# Altium PCB Control_Supply_PCB.PcbDoc (part 1 of 3)
Units mm, origin at the board's own origin, x right, y up, seen from the top; angles counter-clockwise.
Board outline 82 x 102 mm, 2 copper layers (Top Layer, Bottom Layer); 204 components, 0 nets, 808 pads, 240 vias.
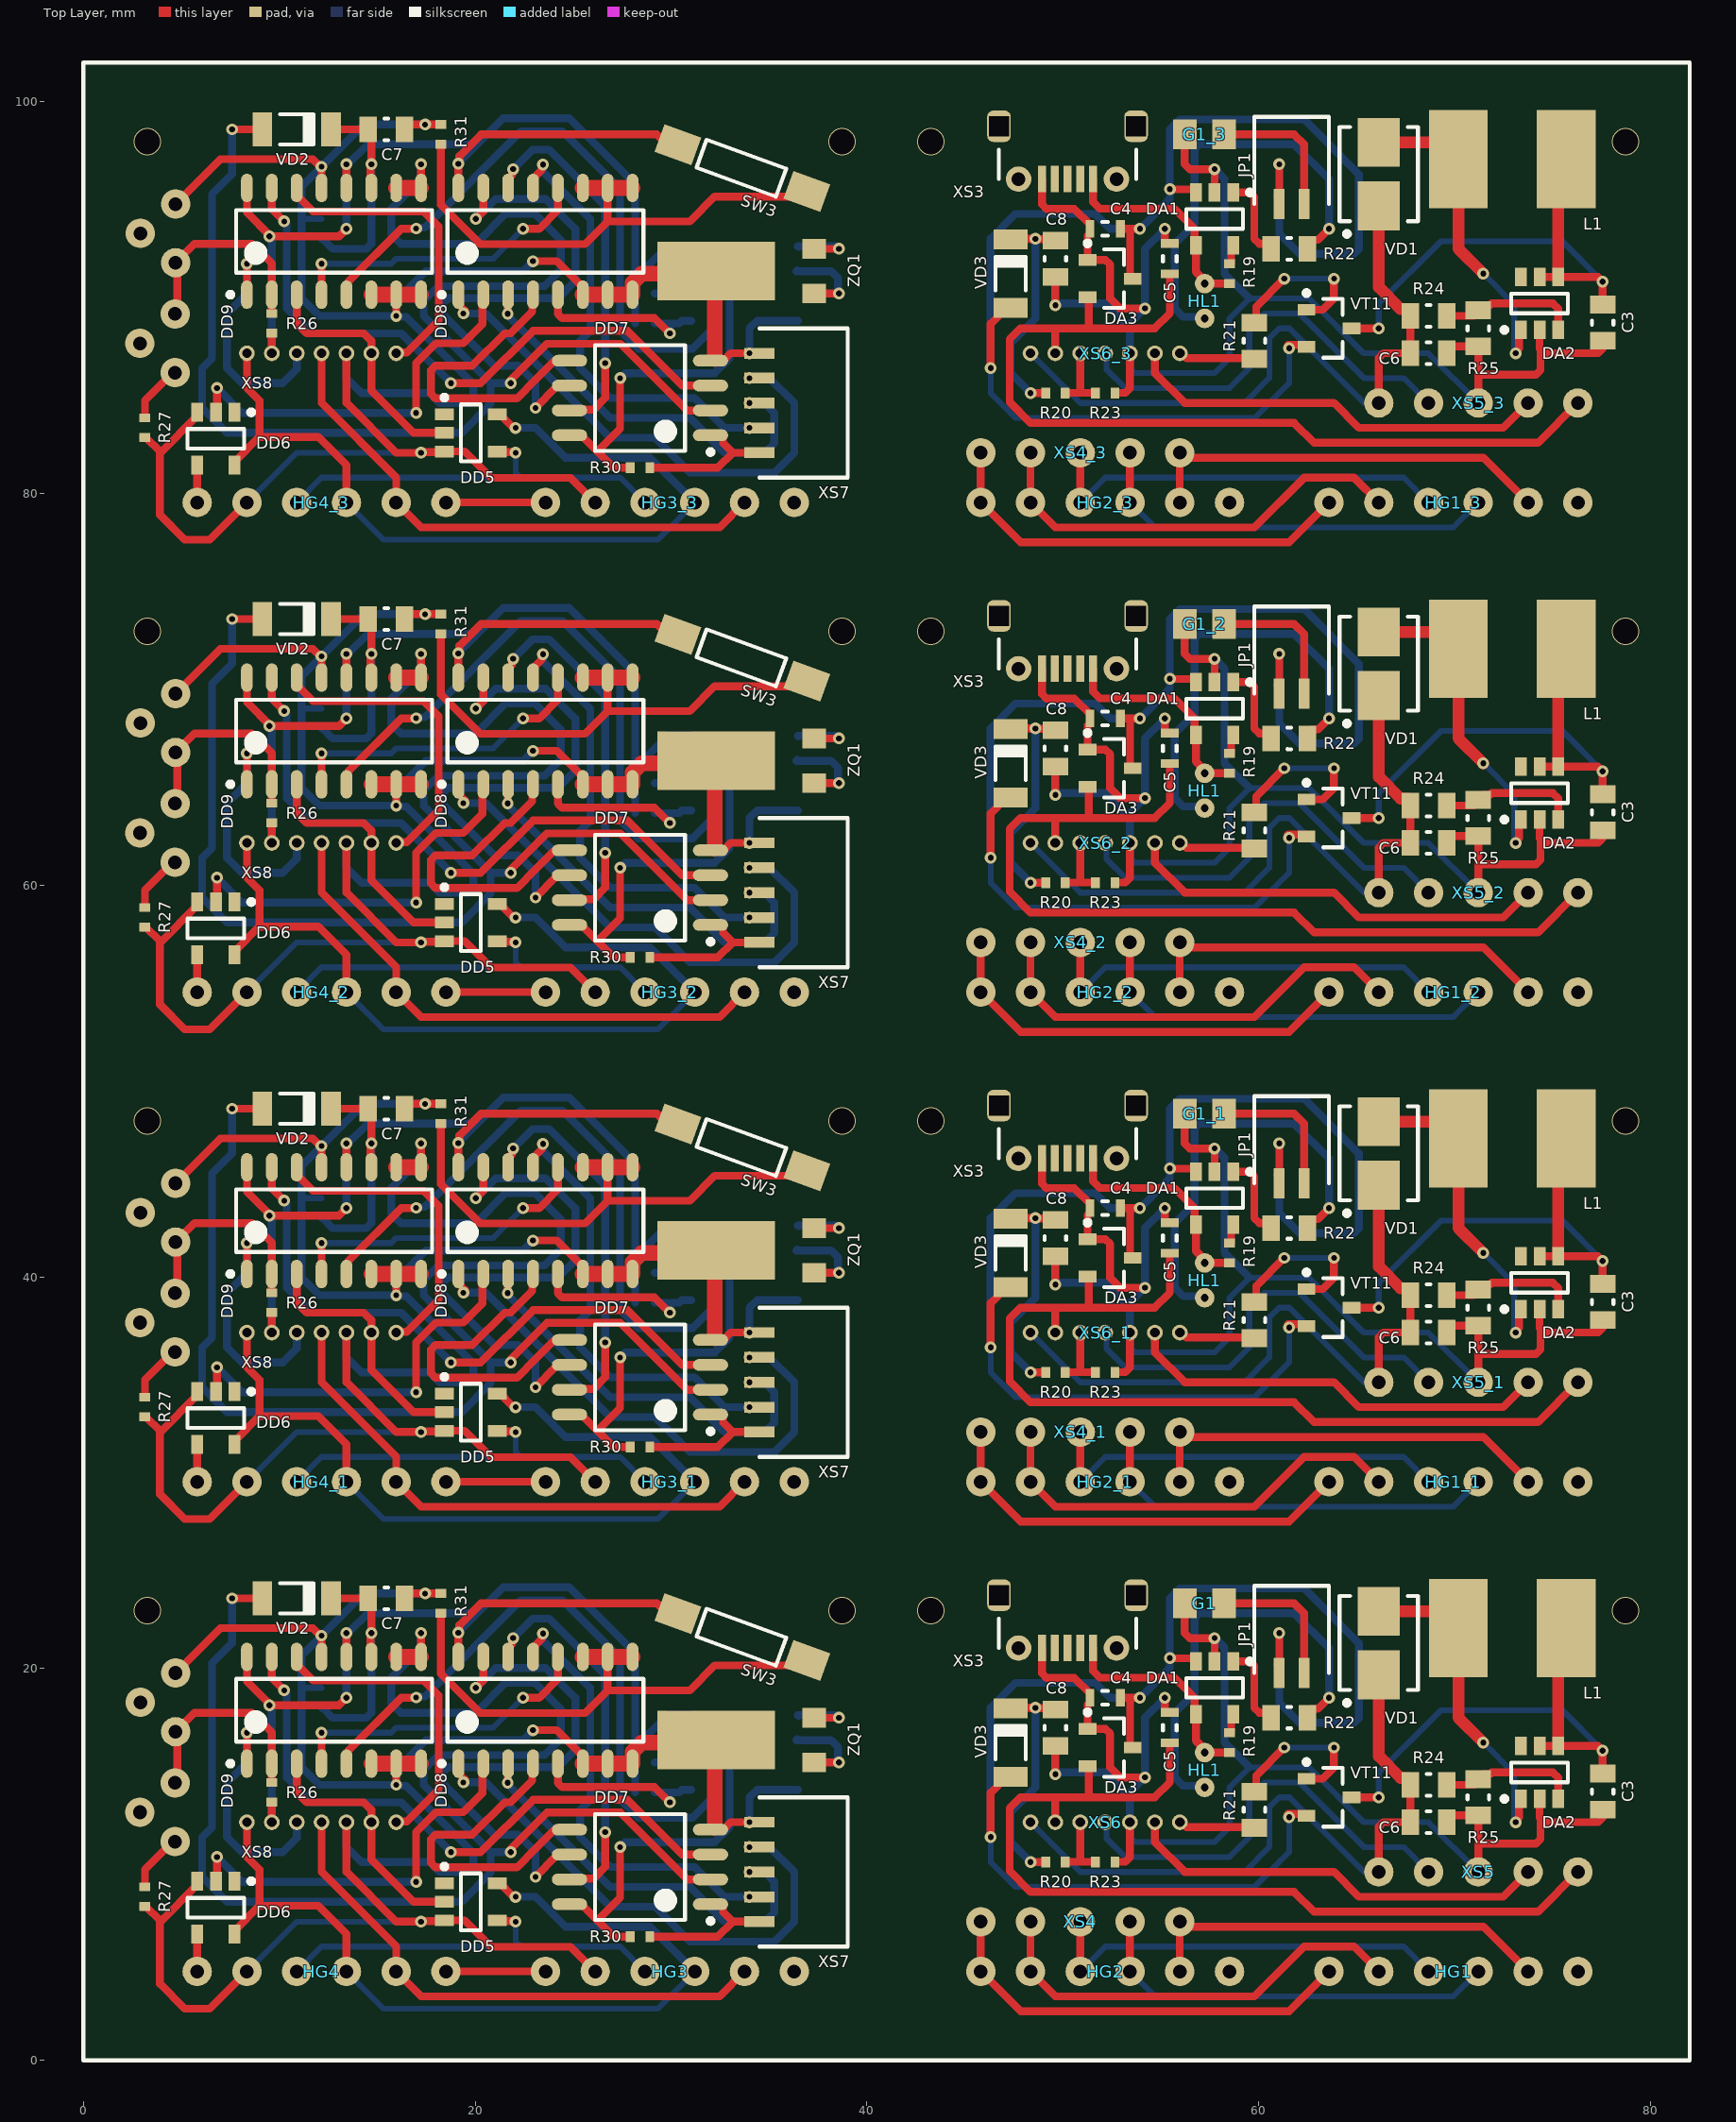
[diagram p0: Top Layer view]
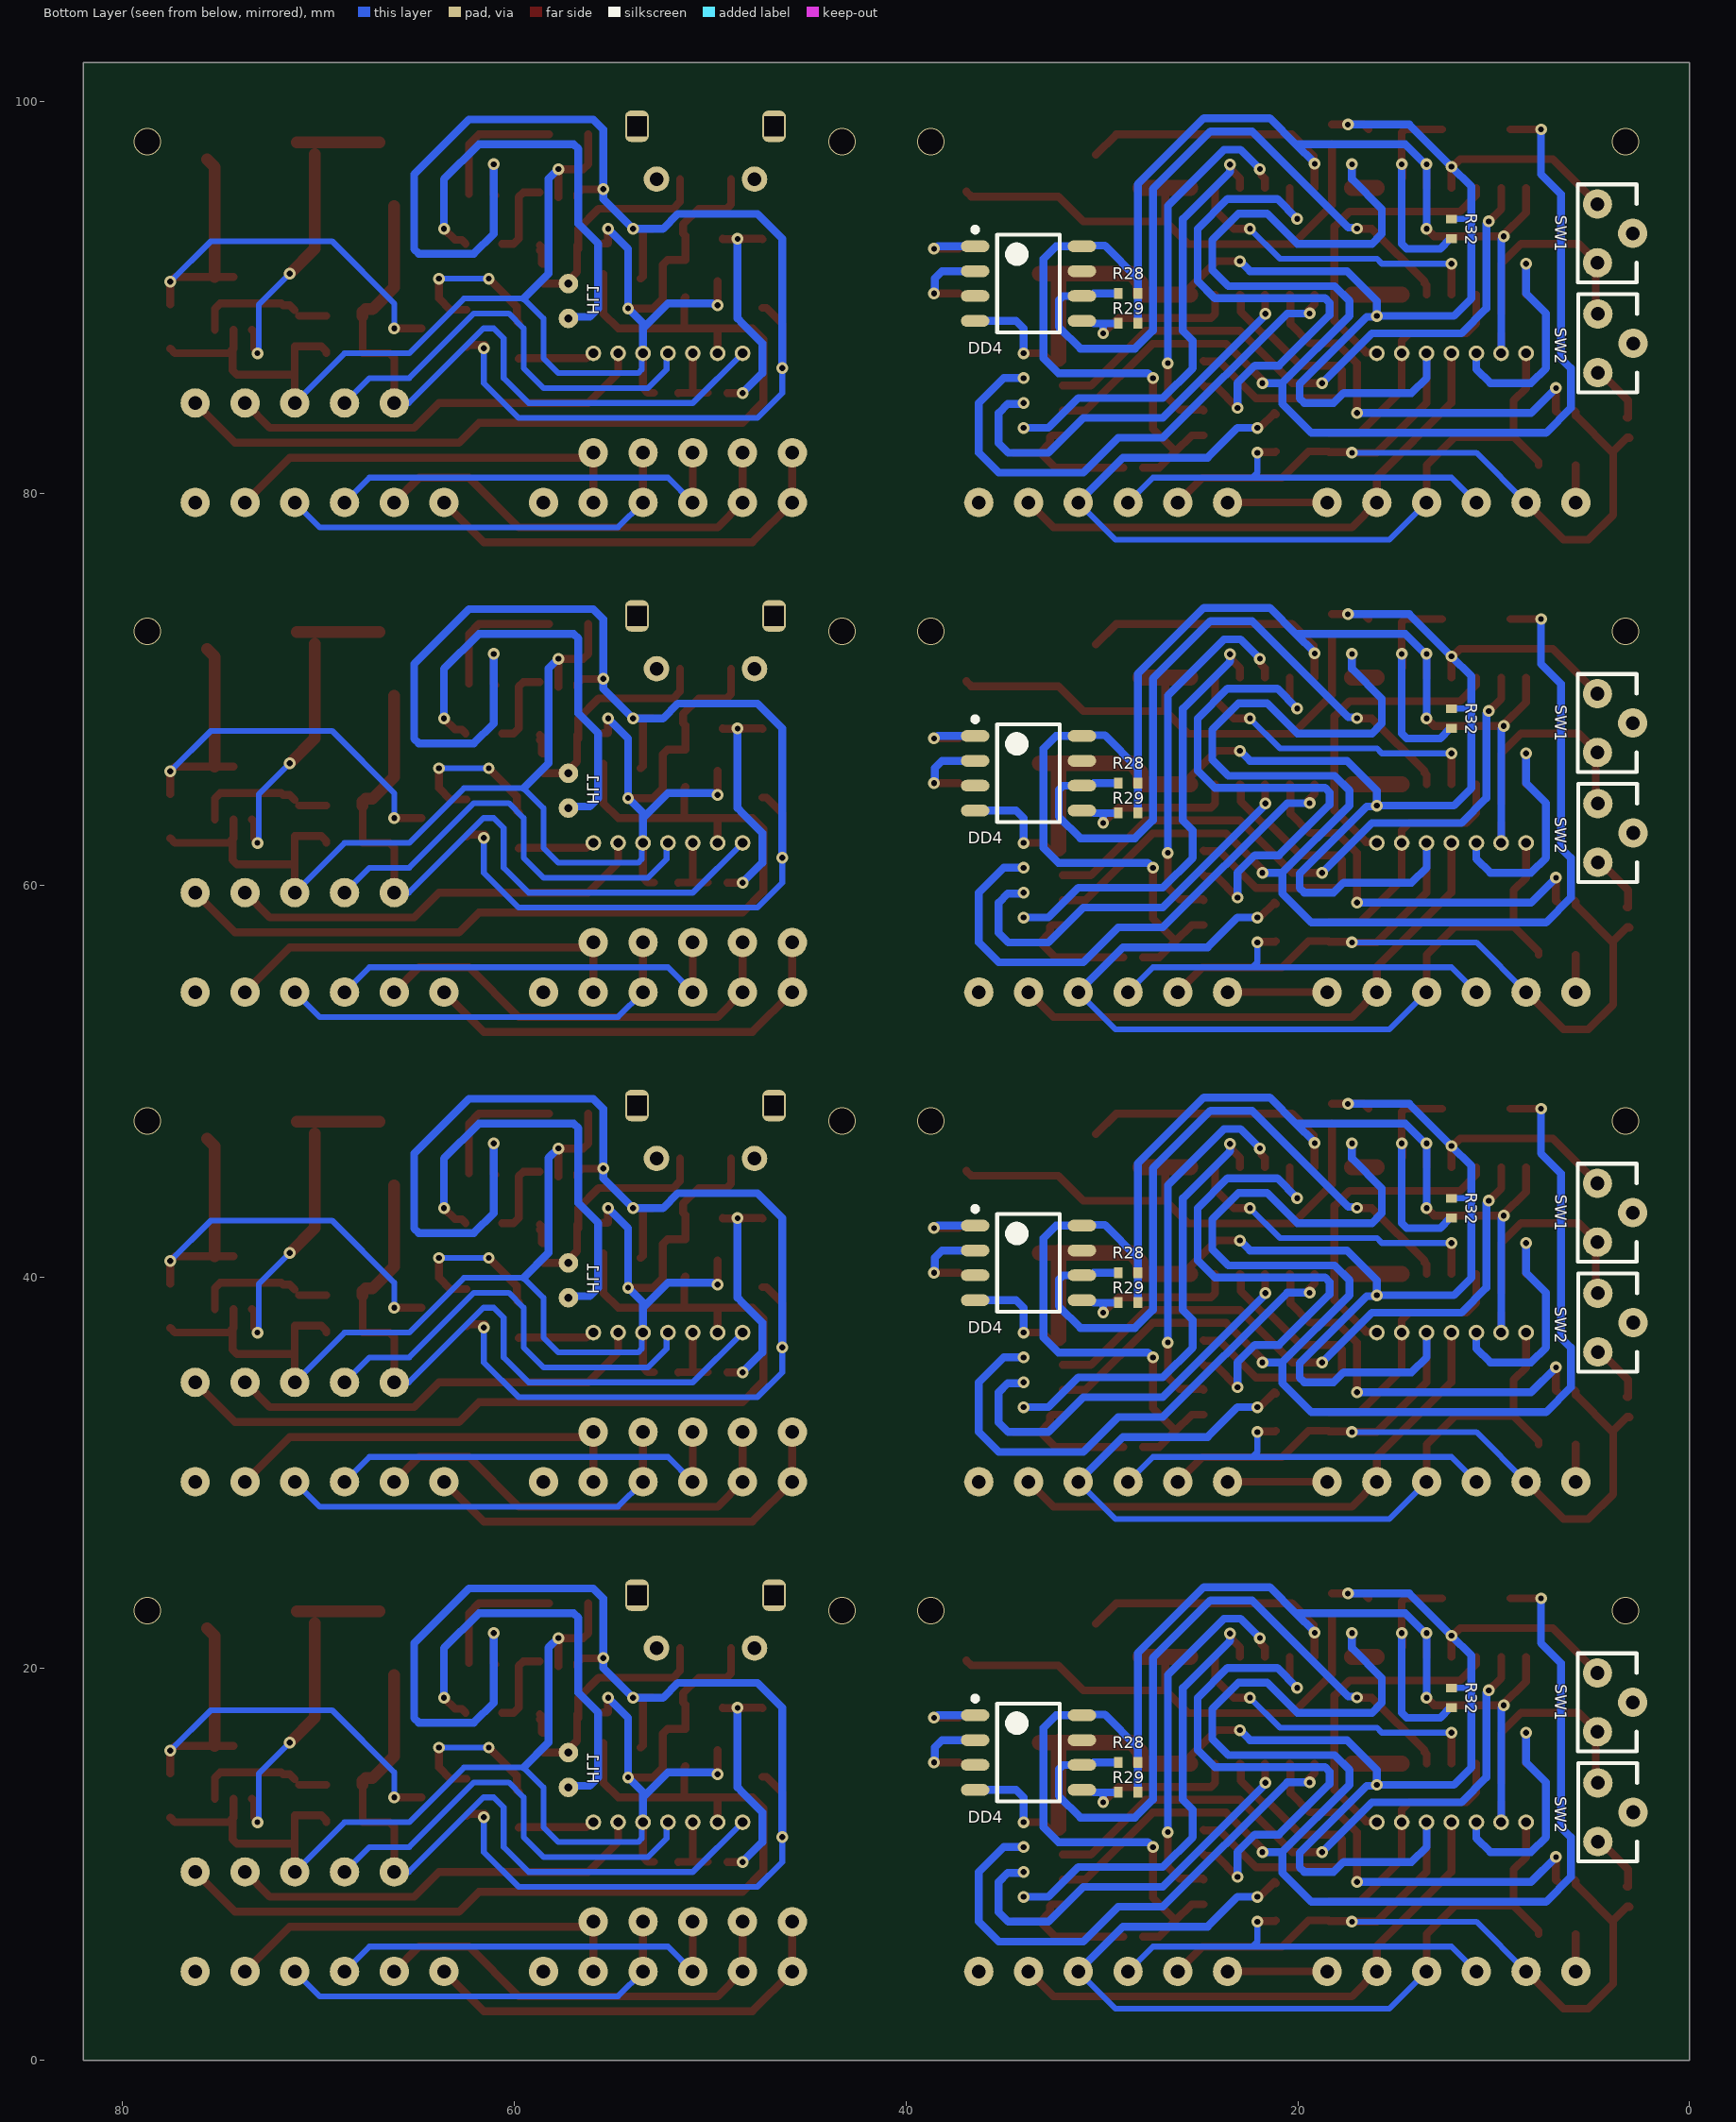
[diagram p1: Bottom Layer view, seen from below]

## Layer stack, top to bottom
Top Solder: solder mask 0.0102, Solder Resist, Dk 3.5
Top Layer: signal copper 0.0356
Dielectric 1: dielectric 0.32, FR-4, Dk 4.8
Bottom Layer: signal copper 0.0356
Bottom Solder: solder mask 0.0102, Solder Resist, Dk 3.5

## Board outline
0,0 0,102 82,102 82,0

## Design rules (kind name [scope] priority, off if disabled: settings)
Clearance [All] p1: gap=0.254 ignorepadtopadclearanceinfootprint=FALSE except(0: Arc-Hole Track-Hole SMDPad-Hole THPad-Hole Via-Hole Fill-Hole Poly-Hole Region-Hole Text-Hole; 0.05: Arc-Fill Arc-Poly Arc-Region Track-Fill Track-Poly Track-Region SMDPad-Fill SMDPad-Poly SMDPad-Region THPad-Fill THPad-Poly THPad-Region Via-Fill Via-Poly Via-Region)
PolygonConnect [All] p1: connectstyle=Relief reliefconductorwidth=0.254 reliefentries=4 polygonreliefangle="90 Angle" airgapwidth=0.254
RoutingVias [All] p1: holewidth=0.711 width=1.27 viastyle="Through Hole" minholewidth=0.711 minwidth=1.27 maxholewidth=0.711 maxwidth=1.27
SolderMaskExpansion [All] p1: expansion=0.102 istentingtop=FALSE
Width [All] p1: maxlimit=2.54 minlimit=0.254 preferedwidth=0.254 minimp=50.000000 maximp=50.000000 favimp=50.000000
30 further rules are at their usual default settings.

## Classes and differential pairs
component class Supply_core: C3 C4 C5 C6 C8 DA1 DA2 DA3 G1 HG1 HG2 HL1 JP1 L1 R19 R20 R21 R22 R23 R24 R25 VD1 VD3 VT11 XS3 XS4 XS5 XS6
component class Control_core: C7 DD4 DD5 DD6 DD7 DD8 DD9 HG3 HG4 R26 R27 R28 R29 R30 R31 R32 SW1 SW2 SW3 VD2 XS7 XS8 ZQ1

## Components (designator, comment, footprint, x,y, rotation, side; value= is the part's Value field where it differs from the comment)
C3 "C0805" CHIP-0805 77.56,38.72 r90 top
C3 "C0805" CHIP-0805 77.56,63.72 r90 top
C3 "C0805" CHIP-0805 77.56,88.72 r90 top
C3 "C0805" CHIP-0805 77.56,13.72 r90 top value=22u
C4 "C0805" CHIP-0603 52.16,43.51 r0 top
C4 "C0805" CHIP-0603 52.16,68.51 r0 top
C4 "C0805" CHIP-0603 52.16,93.51 r0 top
C4 "C0805" CHIP-0603 52.16,18.51 r0 top value=1u
C5 "C0805" CHIP-0603 55.462,41.986 r270 top
C5 "C0805" CHIP-0603 55.462,66.986 r270 top
C5 "C0805" CHIP-0603 55.462,91.986 r270 top
C5 "C0805" CHIP-0603 55.462,16.986 r270 top value=1u
C6 "C0805" CHIP-0805 68.67,37.16 r180 top
C6 "C0805" CHIP-0805 68.67,62.16 r180 top
C6 "C0805" CHIP-0805 68.67,87.16 r180 top
C6 "C0805" CHIP-0805 68.67,12.16 r180 top value=22u
C7 "C0805" CHIP-0805 15.462,48.59 r0 top
C7 "C0805" CHIP-0805 15.462,73.59 r0 top
C7 "C0805" CHIP-0805 15.462,98.59 r0 top
C7 "C0805" CHIP-0805 15.462,23.59 r0 top value=10n
C8 "C0805" CHIP-0805 49.62,41.986 r90 top
C8 "C0805" CHIP-0805 49.62,66.986 r90 top
C8 "C0805" CHIP-0805 49.62,91.986 r90 top
C8 "C0805" CHIP-0805 49.62,16.986 r90 top value=22u
DA1 "LTC4054" SOT23-5 57.748,44.018 r270 top
DA1 "LTC4054" SOT23-5 57.748,69.018 r270 top
DA1 "LTC4054" SOT23-5 57.748,94.018 r270 top
DA1 "LTC4054" SOT23-5 57.748,19.018 r270 top
DA2 "SX1308" SOT23-6 74.34,39.7 r90 top
DA2 "SX1308" SOT23-6 74.34,64.7 r90 top
DA2 "SX1308" SOT23-6 74.34,89.7 r90 top
DA2 "SX1308" SOT23-6 74.34,14.7 r90 top
DA3 "XC6206" SOT23-3 52.414,40.97 r0 top
DA3 "XC6206" SOT23-3 52.414,65.97 r0 top
DA3 "XC6206" SOT23-3 52.414,90.97 r0 top
DA3 "XC6206" SOT23-3 52.414,15.97 r0 top
DD4 "DS1337" SOIC-8 33.75,40.716 r180 bottom
DD4 "DS1337" SOIC-8 33.75,65.716 r180 bottom
DD4 "DS1337" SOIC-8 33.75,90.716 r180 bottom
DD4 "DS1337" SOIC-8 33.75,15.716 r180 bottom
DD5 "74LV1T34" SOT23-5 19.78,33.096 r0 top
DD5 "74LV1T34" SOT23-5 19.78,58.096 r0 top
DD5 "74LV1T34" SOT23-5 19.78,83.096 r0 top
DD5 "74LV1T34" SOT23-5 19.78,8.096 r0 top
DD6 "74LV1T34" SOT23-5 6.765,32.795 r270 top
DD6 "74LV1T34" SOT23-5 6.765,57.795 r270 top
DD6 "74LV1T34" SOT23-5 6.765,82.795 r270 top
DD6 "74LV1T34" SOT23-5 6.765,7.795 r270 top
DD7 "ATtiny85" SOIC-8-ATtiny85 28.416,34.874 r180 top
DD7 "ATtiny85" SOIC-8-ATtiny85 28.416,59.874 r180 top
DD7 "ATtiny85" SOIC-8-ATtiny85 28.416,84.874 r180 top
DD7 "ATtiny85" SOIC-8-ATtiny85 28.416,9.874 r180 top
DD8 "CD4053" SOIC-16 23.59,42.875 r90 top
DD8 "CD4053" SOIC-16 23.59,67.875 r90 top
DD8 "CD4053" SOIC-16 23.59,92.875 r90 top
DD8 "CD4053" SOIC-16 23.59,17.875 r90 top
DD9 "CD4053" SOIC-16 12.795,42.875 r90 top
DD9 "CD4053" SOIC-16 12.795,67.875 r90 top
DD9 "CD4053" SOIC-16 12.795,92.875 r90 top
DD9 "CD4053" SOIC-16 12.795,17.875 r90 top
G1 "Battery" BATTERY 58.224,23.336 r180 top
G1_1 "Battery" BATTERY 58.224,48.336 r180 top
G1_2 "Battery" BATTERY 58.224,73.336 r180 top
G1_3 "Battery" BATTERY 58.224,98.336 r180 top
HG1 "HDSP-2000_Colums" HDSP-2000_COL 63.59,4.54 r0 top
HG1_1 "HDSP-2000_Colums" HDSP-2000_COL 63.59,29.54 r0 top
HG1_2 "HDSP-2000_Colums" HDSP-2000_COL 63.59,54.54 r0 top
HG1_3 "HDSP-2000_Colums" HDSP-2000_COL 63.59,79.54 r0 top
HG2 "HDSP-2000_Colums" HDSP-2000_COL 45.81,4.54 r0 top
HG2_1 "HDSP-2000_Colums" HDSP-2000_COL 45.81,29.54 r0 top
HG2_2 "HDSP-2000_Colums" HDSP-2000_COL 45.81,54.54 r0 top
HG2_3 "HDSP-2000_Colums" HDSP-2000_COL 45.81,79.54 r0 top
HG3 "HDSP-2000_SPI" HDSP-2000_SPI 36.29,4.54 r180 top
HG3_1 "HDSP-2000_SPI" HDSP-2000_SPI 36.29,29.54 r180 top
HG3_2 "HDSP-2000_SPI" HDSP-2000_SPI 36.29,54.54 r180 top
HG3_3 "HDSP-2000_SPI" HDSP-2000_SPI 36.29,79.54 r180 top
HG4 "HDSP-2000_SPI" HDSP-2000_SPI 18.51,4.54 r180 top
HG4_1 "HDSP-2000_SPI" HDSP-2000_SPI 18.51,29.54 r180 top
HG4_2 "HDSP-2000_SPI" HDSP-2000_SPI 18.51,54.54 r180 top
HG4_3 "HDSP-2000_SPI" HDSP-2000_SPI 18.51,79.54 r180 top
HL1 "LED" LED_1 57.24,38.176 r90 top
HL1 "LED" LED_1 57.24,63.176 r90 top
HL1 "LED" LED_1 57.24,88.176 r90 top
HL1 "LED" LED_1 57.24,13.176 r90 top
JP1 "Jamper" JAMPER 62.32,44.78 r180 top
JP1 "Jamper" JAMPER 62.32,69.78 r180 top
JP1 "Jamper" JAMPER 62.32,94.78 r180 top
JP1 "Jamper" JAMPER 62.32,19.78 r180 top
L1 "L" L_SMD 75.694,47.066 r180 top
L1 "L" L_SMD 75.694,72.066 r180 top
L1 "L" L_SMD 75.694,97.066 r180 top
L1 "L" L_SMD 75.694,22.066 r180 top
R19 "R0805" CHIP-0402 58.51,41.224 r90 top
R19 "R0805" CHIP-0402 58.51,66.224 r90 top
R19 "R0805" CHIP-0402 58.51,91.224 r90 top
R19 "R0805" CHIP-0402 58.51,16.224 r90 top value=5,1k
R20 "R0805" CHIP-0402 49.628,35.128 r0 top
R20 "R0805" CHIP-0402 49.628,60.128 r0 top
R20 "R0805" CHIP-0402 49.628,85.128 r0 top
R20 "R0805" CHIP-0402 49.628,10.128 r0 top value=47k
R21 "R0805" CHIP-0805 59.78,37.795 r90 top
R21 "R0805" CHIP-0805 59.78,62.795 r90 top
R21 "R0805" CHIP-0805 59.78,87.795 r90 top
R21 "R0805" CHIP-0805 59.78,12.795 r90 top value=220R
R22 "R0805" CHIP-0805 61.558,42.494 r180 top
R22 "R0805" CHIP-0805 61.558,67.494 r180 top
R22 "R0805" CHIP-0805 61.558,92.494 r180 top
R22 "R0805" CHIP-0805 61.558,17.494 r180 top value=470R
R23 "R0805" CHIP-0402 52.16,35.128 r0 top
R23 "R0805" CHIP-0402 52.16,60.128 r0 top
R23 "R0805" CHIP-0402 52.16,85.128 r0 top
R23 "R0805" CHIP-0402 52.16,10.128 r0 top value=47k
R24 "R0805" CHIP-0805 68.67,39.065 r180 top
R24 "R0805" CHIP-0805 68.67,64.065 r180 top
R24 "R0805" CHIP-0805 68.67,89.065 r180 top
R24 "R0805" CHIP-0805 68.67,14.065 r180 top value=15k
R25 "R0805" CHIP-0805 71.21,38.43 r90 top
R25 "R0805" CHIP-0805 71.21,63.43 r90 top
R25 "R0805" CHIP-0805 71.21,88.43 r90 top
R25 "R0805" CHIP-0805 71.21,13.43 r90 top value=2k
R26 "R0402" CHIP-0402 9.62,38.684 r270 top
R26 "R0402" CHIP-0402 9.62,63.684 r270 top
R26 "R0402" CHIP-0402 9.62,88.684 r270 top
R26 "R0402" CHIP-0402 9.62,13.684 r270 top value=10k
R27 "R0402" CHIP-0402 3.143,33.358 r270 top
R27 "R0402" CHIP-0402 3.143,58.358 r270 top
R27 "R0402" CHIP-0402 3.143,83.358 r270 top
R27 "R0402" CHIP-0402 3.143,8.358 r270 top value=51k
R28 "R0402" CHIP-0402 28.67,40.208 r180 bottom
R28 "R0402" CHIP-0402 28.67,65.208 r180 bottom
R28 "R0402" CHIP-0402 28.67,90.208 r180 bottom
R28 "R0402" CHIP-0402 28.67,15.208 r180 bottom value=4,7k
R29 "R0402" CHIP-0402 28.67,38.684 r180 bottom
R29 "R0402" CHIP-0402 28.67,63.684 r180 bottom
R29 "R0402" CHIP-0402 28.67,88.684 r180 bottom
R29 "R0402" CHIP-0402 28.67,13.684 r180 bottom value=4,7k
R30 "R0402" CHIP-0402 28.416,31.318 r180 top
R30 "R0402" CHIP-0402 28.416,56.318 r180 top
R30 "R0402" CHIP-0402 28.416,81.318 r180 top
R30 "R0402" CHIP-0402 28.416,6.318 r180 top value=20k
R31 "R0402" CHIP-0402 18.256,48.336 r90 top
R31 "R0402" CHIP-0402 18.256,73.336 r90 top
R31 "R0402" CHIP-0402 18.256,98.336 r90 top
R31 "R0402" CHIP-0402 18.256,23.336 r90 top value=20k
R32 "R0402" CHIP-0402 12.16,43.51 r90 bottom
R32 "R0402" CHIP-0402 12.16,68.51 r90 bottom
R32 "R0402" CHIP-0402 12.16,93.51 r90 bottom
R32 "R0402" CHIP-0402 12.16,18.51 r90 bottom value=10k
SW1 "Button" BUTTON 4.707,44.78 r270 bottom
SW1 "Button" BUTTON 4.707,69.78 r270 bottom
SW1 "Button" BUTTON 4.707,94.78 r270 bottom
SW1 "Button" BUTTON 4.707,19.78 r270 bottom
SW2 "Button" BUTTON 4.685,39.168 r270 bottom
SW2 "Button" BUTTON 4.685,64.168 r270 bottom
SW2 "Button" BUTTON 4.685,89.168 r270 bottom
SW2 "Button" BUTTON 4.685,14.168 r270 bottom
SW3 "Switch" SWITCH 36.925,45.415 r160 top
SW3 "Switch" SWITCH 36.925,70.415 r160 top
SW3 "Switch" SWITCH 36.925,95.415 r160 top
SW3 "Switch" SWITCH 36.925,20.415 r160 top
VD1 "SS34" DIOD 66.13,46.304 r90 top
VD1 "SS34" DIOD 66.13,71.304 r90 top
VD1 "SS34" DIOD 66.13,96.304 r90 top
VD1 "SS34" DIOD 66.13,21.304 r90 top
VD2 "BAS85" DIOD_MELF 10.89,48.59 r180 top
VD2 "BAS85" DIOD_MELF 10.89,73.59 r180 top
VD2 "BAS85" DIOD_MELF 10.89,98.59 r180 top
VD2 "BAS85" DIOD_MELF 10.89,23.59 r180 top
VD3 "BAS85" DIOD_MELF 47.334,41.224 r270 top
VD3 "BAS85" DIOD_MELF 47.334,66.224 r270 top
VD3 "BAS85" DIOD_MELF 47.334,91.224 r270 top
VD3 "BAS85" DIOD_MELF 47.334,16.224 r270 top
VT11 "AO3401A" SOT23-3 63.59,38.43 r0 top
VT11 "AO3401A" SOT23-3 63.59,63.43 r0 top
VT11 "AO3401A" SOT23-3 63.59,88.43 r0 top
VT11 "AO3401A" SOT23-3 63.59,13.43 r0 top
XS3 "Micro_USB" Micro_USB 50.24,46.05 r180 top
XS3 "Micro_USB" Micro_USB 50.24,71.05 r180 top
XS3 "Micro_USB" Micro_USB 50.24,96.05 r180 top
XS3 "Micro_USB" Micro_USB 50.24,21.05 r180 top
XS4 "Socket" SOCKET 45.81,7.08 r0 top
XS4_1 "Socket" SOCKET 45.81,32.08 r0 top
XS4_2 "Socket" SOCKET 45.81,57.08 r0 top
XS4_3 "Socket" SOCKET 45.81,82.08 r0 top
XS5 "Socket" SOCKET 66.13,9.62 r0 top
XS5_1 "Socket" SOCKET 66.13,34.62 r0 top
XS5_2 "Socket" SOCKET 66.13,59.62 r0 top
XS5_3 "Socket" SOCKET 66.13,84.62 r0 top
XS6 "Socket_7" SOCKET_7 48.35,12.16 r0 top
XS6_1 "Socket_7" SOCKET_7 48.35,37.16 r0 top
XS6_2 "Socket_7" SOCKET_7 48.35,62.16 r0 top
XS6_3 "Socket_7" SOCKET_7 48.35,87.16 r0 top
XS7 "Prog_connector" Prog_connector 34.512,32.08 r90 top
XS7 "Prog_connector" Prog_connector 34.512,57.08 r90 top
XS7 "Prog_connector" Prog_connector 34.512,82.08 r90 top
XS7 "Prog_connector" Prog_connector 34.512,7.08 r90 top
XS8 "Socket_7" SOCKET_7 8.35,37.16 r0 top
XS8 "Socket_7" SOCKET_7 8.35,62.16 r0 top
XS8 "Socket_7" SOCKET_7 8.35,87.16 r0 top
XS8 "Socket_7" SOCKET_7 8.35,12.16 r0 top
ZQ1 "HZ" HZ 37.306,41.351 r90 top
ZQ1 "HZ" HZ 37.306,66.351 r90 top
ZQ1 "HZ" HZ 37.306,91.351 r90 top
ZQ1 "HZ" HZ 37.306,16.351 r90 top

## Footprints (in the part's own frame and the unit in brackets; to place one, negate y for a bottom-side part, rotate by r counter-clockwise, add the part's x,y. Pads: shape width x height; smd on the part's side, far side on the other; paste and mask are expansions set on the pad)
BATTERY [mm]
  rect 1.2x1.524 smd: 1(0,0) 2(2,0)
BUTTON [mm]
  round 1.5 hole 0.7: 1(0,0) 2(3,0) 3(1.5,1.8)
  silkscreen extent -1,-1 4,2
CHIP-0402 [mm] "Chip Resistor, 2-Leads, Body 1,00x0,50mm, IPC Medium Density"
  rect 0.45x0.55 smd: 1(-0.5,0) 2(0.5,0)
  body extent -0.5,-0.25 0.5,0.25, height 0.35
CHIP-0603 [mm] "Chip Capacitor, 2-Leads, Body 1,55x0,85mm, IPC Medium Density"
  rect 0.45x0.9 smd: 1(-0.775,0) 2(0.775,0)
  silkscreen extent -0.15,-0.35 0.15,0.35, body extent -0.77,-0.43 0.77,0.42, height 0.35
CHIP-0805 [mm] "Chip Resistor, 2-Leads, Body 2,00x1,25mm, IPC Medium Density"
  rect 0.9x1.3 smd: 1(-0.925,0) 2(0.925,0)
  silkscreen extent -0.1,-0.55 0.1,0.55, body extent -1,-0.63 1,0.63, height 0.7
DIOD [mm] "Molded Diode, 2-Leads, Body 4,40x3,63mm, IPC Medium Density"
  rect 2.5x2.15 smd: 1(-1.625,0) 2(1.625,0)
  silkscreen extent -3.17,-2 2.4,2, body extent -2.38,-1.97 2.37,1.97, height 2.6
DIOD_MELF [mm] "MELF Diode, 2-Leads, Body 3,50x1,53mm, IPC Medium Density"
  rect 1x1.75 smd: 1(-1.75,0) 2(1.75,0)
  silkscreen extent -0.85,-0.77 0.85,0.77, body extent -1.85,-0.8 1.85,0.8, height 1.59
HDSP-2000_COL [mm]
  round 1.5 hole 0.7: 1(0,0) 2(2.54,0) 3(5.08,0) 4(7.62,0) 5(10.16,0) 6(12.7,0)
HDSP-2000_SPI [mm]
  round 1.5 hole 0.7: 7(0,0) 8(2.54,0) 9(5.08,0) 10(7.62,0) 11(10.16,0) 12(12.7,0)
HZ [mm]
  rect 1x1.2 smd: 1(-1.143,0) 2(1.143,0)
  rect 3x6 smd: 3(0,5)
JAMPER [mm]
  rect 0.55x1.524 smd: 1(0,0) 2(1.27,0)
  silkscreen extent -1.27,-4.44 2.54,0
L_SMD [mm]
  rect 3x5 smd: 1(0,0) 2(5.5,0)
LED_1 [mm]
  round 1 hole 0.4: 1(0.762,0) 2(2.54,0)
Micro_USB [mm]
  rect 0.4x1.35 smd: 1(-1.3,0) 2(-0.65,0) 3(0,0) 4(0.65,0) 5(1.3,0)
  round 1.3 hole 0.7: 6(-2.5,0) 7(2.5,0)
  rrect50% 1.2x1.6 hole 1 square: 8(-3.5,-2.7) 9(3.5,-2.7)
  silkscreen extent -3.5,-1.5 3.5,0
Prog_connector [mm]
  rect 0.55x1.524 smd: 1(0,0) 2(1.27,0) 3(2.54,0) 4(3.81,0) 5(5.08,0)
  silkscreen extent -1.27,-4.5 6.35,0
SOCKET [mm]
  round 1.5 hole 0.7: 1(0,0) 2(2.54,0) 3(5.08,0) 4(7.62,0) 5(10.16,0)
SOCKET_7 [mm]
  round 0.8 hole 0.5: 1(0,0) 2(1.27,0) 3(2.54,0) 4(3.81,0) 5(5.08,0) 6(6.35,0) 7(7.62,0)
SOIC-8 [mm] "SOIC, 8-Leads, Body 4,88x3,90mm, Pitch 1,27mm, IPC Medium Density"
  oval 1.45x0.6 smd: 1(-2.725,1.905) 2(-2.725,0.635) 3(-2.725,-0.635) 4(-2.725,-1.905) 5(2.725,-1.905) 6(2.725,-0.635) 7(2.725,0.635) 8(2.725,1.905)
  silkscreen extent -2.85,-2.5 1.6,2.88, body extent -2,-2.5 2,2.5, height 1.75
SOIC-8-ATtiny85 [mm] "SOIC, 8-Leads, Body 5,24x5,29mm, Pitch 1,27mm, IPC Medium Density"
  oval 1.8x0.6 smd: 1(-3.6,1.905) 2(-3.6,0.635) 3(-3.6,-0.635) 4(-3.6,-1.905) 5(3.6,-1.905) 6(3.6,-0.635) 7(3.6,0.635) 8(3.6,1.905)
  silkscreen extent -3.73,-2.7 2.3,2.88, body extent -2.7,-2.7 2.7,2.7, height 1.75
SOIC-16 [mm] "SOIC, 16-Leads, Body 9,90x3,90mm, Pitch 1,27mm, IPC Medium Density"
  oval 1.45x0.6 smd: 1(-2.725,4.445) 2(-2.725,3.175) 3(-2.725,1.905) 4(-2.725,0.635) 5(-2.725,-0.635) 6(-2.725,-1.905) 7(-2.725,-3.175) 8(-2.725,-4.445) 9(2.725,-4.445) 10(2.725,-3.175) 11(2.725,-1.905) 12(2.725,-0.635) 13(2.725,0.635) 14(2.725,1.905) 15(2.725,3.175) 16(2.725,4.445)
  silkscreen extent -2.85,-5 1.6,5.42, body extent -2,-5 2,5, height 1.75
SOT23-3 [mm] "SOT23, 3-Leads, Body 2,90x2,30mm, Pitch 0,95mm, IPC Medium Density"
  rect 0.9x0.6 smd: 1(-1.15,0.95) 2(-1.15,-0.95) 3(1.15,0)
  silkscreen extent -1.27,-1.5 0.7,1.92, body extent -0.7,-1.5 0.7,1.5, height 1.1
SOT23-5 [mm] "SOT23, 5-Leads, Body 2,85x2,80mm, Pitch 0,95mm, IPC Medium Density"
  rect 0.95x0.6 smd: 1(-1.35,0.95) 2(-1.35,0) 3(-1.35,-0.95) 4(1.35,-0.95) 5(1.35,0.95)
  silkscreen extent -1.47,-1.45 0.5,1.93, body extent -0.87,-1.45 0.87,1.45, height 1.1
SOT23-6 [mm] "SOT23, 6-Leads, Body 2,85x2,80mm, Pitch 0,95mm, IPC Medium Density"
  rect 0.95x0.6 smd: 1(-1.35,0.95) 2(-1.35,0) 3(-1.35,-0.95) 4(1.35,-0.95) 5(1.35,0) 6(1.35,0.95)
  silkscreen extent -1.47,-1.45 0.5,1.92, body extent -0.87,-1.45 0.87,1.45, height 1.1
SWITCH [mm]
  rect 2x1.524 smd: 1(0,0) 2(7,0)

## Part data
DD4: Manufacturer=Maxim, Name=DS1337
HG1 HG2 HG3 HG4: Manufacturer=HP, Name=HDSP-2000
DA1: Name=LTC4054
DA2: Name=SX1308
DA3: Name=XC6206
DD7: Name=ATtiny85
DD8 DD9: Name=CD4053
HL1: Name=LED
VD1: Name=SS34
VD2 VD3: Name=BAS85
VT11: Name=AO3401
XS4: Pin1=Col1, Pin2=Col2, Pin3=Col3, Pin4=Col4, Pin5=Col5
XS5: Pin1=5V, Pin2=PWM, Pin3=GND, Pin4=CLK, Pin5=3V3
XS6 XS8: Pin1=5V, Pin2=3V3, Pin3=BAT, Pin4=PWM, Pin5=GND, Pin6=CLK, Pin7=GATE

## Via types
v1: diameter 0.6, hole 0.3, Top Layer to Bottom Layer, 224 vias
v2: diameter 1.4, hole 1.3, Top Layer to Bottom Layer, 16 vias

## Nets (pads, with @x,y where several pads share a name; then routed paths per layer and width w, separated by ;. In a path a pad name is that pad's centre, name@x,y a point inside that pad or via, vN(x,y) a via of type N, cw(c..) or ccw(c..) an arc to the next point about the centre after c; other vN are vias at no path point)
pads on no net: C3.1 C3.2 C4.1 C4.2 C5.1 C5.2 C6.1 C6.2 C7.1 C7.2 C8.1 C8.2 DA1.1 DA1.2 DA1.3 DA1.4 DA1.5 DA2.1 DA2.2 DA2.3 DA2.4 DA2.5 DA2.6 DA3.1 DA3.2 DA3.3 DD4.1 DD4.2 DD4.3 DD4.4 DD4.5 DD4.6 DD4.7 DD4.8 DD5.1 DD5.2 DD5.3 DD5.4 DD5.5 DD6.1 DD6.2 DD6.3 DD6.4 DD6.5 DD7.1 DD7.2 DD7.3 DD7.4 DD7.5 DD7.6 DD7.7 DD7.8 DD8.1 DD8.2 DD8.3 DD8.4 DD8.5 DD8.6 DD8.7 DD8.8 DD8.9 DD8.10 DD8.11 DD8.12 DD8.13 DD8.14 DD8.15 DD8.16 DD9.1 DD9.2 DD9.3 DD9.4 DD9.5 DD9.6 DD9.7 DD9.8 DD9.9 DD9.10 DD9.11 DD9.12 DD9.13 DD9.14 DD9.15 DD9.16 G1.1 G1.2 G1_1.1 G1_1.2 G1_2.1 G1_2.2 G1_3.1 G1_3.2 HG1.1 HG1.2 HG1.3 HG1.4 HG1.5 HG1.6 HG1_1.1 HG1_1.2 HG1_1.3 HG1_1.4 HG1_1.5 HG1_1.6 HG1_2.1 HG1_2.2 HG1_2.3 HG1_2.4 HG1_2.5 HG1_2.6 HG1_3.1 HG1_3.2 HG1_3.3 HG1_3.4 HG1_3.5 HG1_3.6 HG2.1 HG2.2 HG2.3 HG2.4 HG2.5 HG2.6 HG2_1.1 HG2_1.2 HG2_1.3 HG2_1.4 HG2_1.5 HG2_1.6 HG2_2.1 HG2_2.2 HG2_2.3 HG2_2.4 HG2_2.5 HG2_2.6 HG2_3.1 HG2_3.2 HG2_3.3 HG2_3.4 HG2_3.5 HG2_3.6 HG3.7 HG3.8 HG3.9 HG3.10 HG3.11 HG3.12 HG3_1.7 HG3_1.8 HG3_1.9 HG3_1.10 HG3_1.11 HG3_1.12 HG3_2.7 HG3_2.8 HG3_2.9 HG3_2.10 HG3_2.11 HG3_2.12 HG3_3.7 HG3_3.8 HG3_3.9 HG3_3.10 HG3_3.11 HG3_3.12 HG4.7 HG4.8 HG4.9 HG4.10 HG4.11 HG4.12 HG4_1.7 HG4_1.8 HG4_1.9 HG4_1.10 HG4_1.11 HG4_1.12 HG4_2.7 HG4_2.8 HG4_2.9 HG4_2.10 HG4_2.11 HG4_2.12 HG4_3.7 HG4_3.8 HG4_3.9 HG4_3.10 HG4_3.11 HG4_3.12 HL1.1 HL1.2 JP1.1 JP1.2 L1.1 L1.2 R19.1 R19.2 R20.1 R20.2 R21.1 R21.2 R22.1 R22.2 R23.1 R23.2 R24.1 R24.2 R25.1 R25.2 R26.1 R26.2 R27.1 R27.2 R28.1 R28.2 R29.1 R29.2 R30.1 R30.2 R31.1 R31.2 R32.1 R32.2 SW1.1 SW1.2 SW1.3 SW2.1 SW2.2 SW2.3 SW3.1 SW3.2 VD1.1 VD1.2 VD2.1 VD2.2 VD3.1 VD3.2 VT11.1 VT11.2 VT11.3 XS3.1 XS3.2 XS3.3 XS3.4 XS3.5 XS3.6 XS3.7 XS3.8 XS3.9 XS4.1 XS4.2 XS4.3 XS4.4 XS4.5 XS4_1.1 XS4_1.2 XS4_1.3 XS4_1.4 XS4_1.5 XS4_2.1 XS4_2.2 XS4_2.3 XS4_2.4 XS4_2.5 XS4_3.1 XS4_3.2 XS4_3.3 XS4_3.4 XS4_3.5 XS5.1 XS5.2 XS5.3 XS5.4 XS5.5 XS5_1.1 XS5_1.2 XS5_1.3 XS5_1.4 XS5_1.5 XS5_2.1 XS5_2.2 XS5_2.3 XS5_2.4 XS5_2.5 XS5_3.1 XS5_3.2 XS5_3.3 XS5_3.4 XS5_3.5 XS6.1 XS6.2 XS6.3 XS6.4 XS6.5 XS6.6 XS6.7 XS6_1.1 XS6_1.2 XS6_1.3 XS6_1.4 XS6_1.5 XS6_1.6 XS6_1.7 XS6_2.1 XS6_2.2 XS6_2.3 XS6_2.4 XS6_2.5 XS6_2.6 XS6_2.7 XS6_3.1 XS6_3.2 XS6_3.3 XS6_3.4 XS6_3.5 XS6_3.6 XS6_3.7 XS7.1 XS7.2 XS7.3 XS7.4 XS7.5 XS8.1 XS8.2 XS8.3 XS8.4 XS8.5 XS8.6 XS8.7 ZQ1.1 ZQ1.2 ZQ1.3